# Altium PCB Part_3_ESP_CAM.PcbDoc
Units mm, origin at the board's own origin, x right, y up, seen from the top; angles counter-clockwise.
Board outline 30 x 59.5 mm, 2 copper layers (Top Layer, Bottom Layer); 2 components, 0 nets, 20 pads, 0 vias.
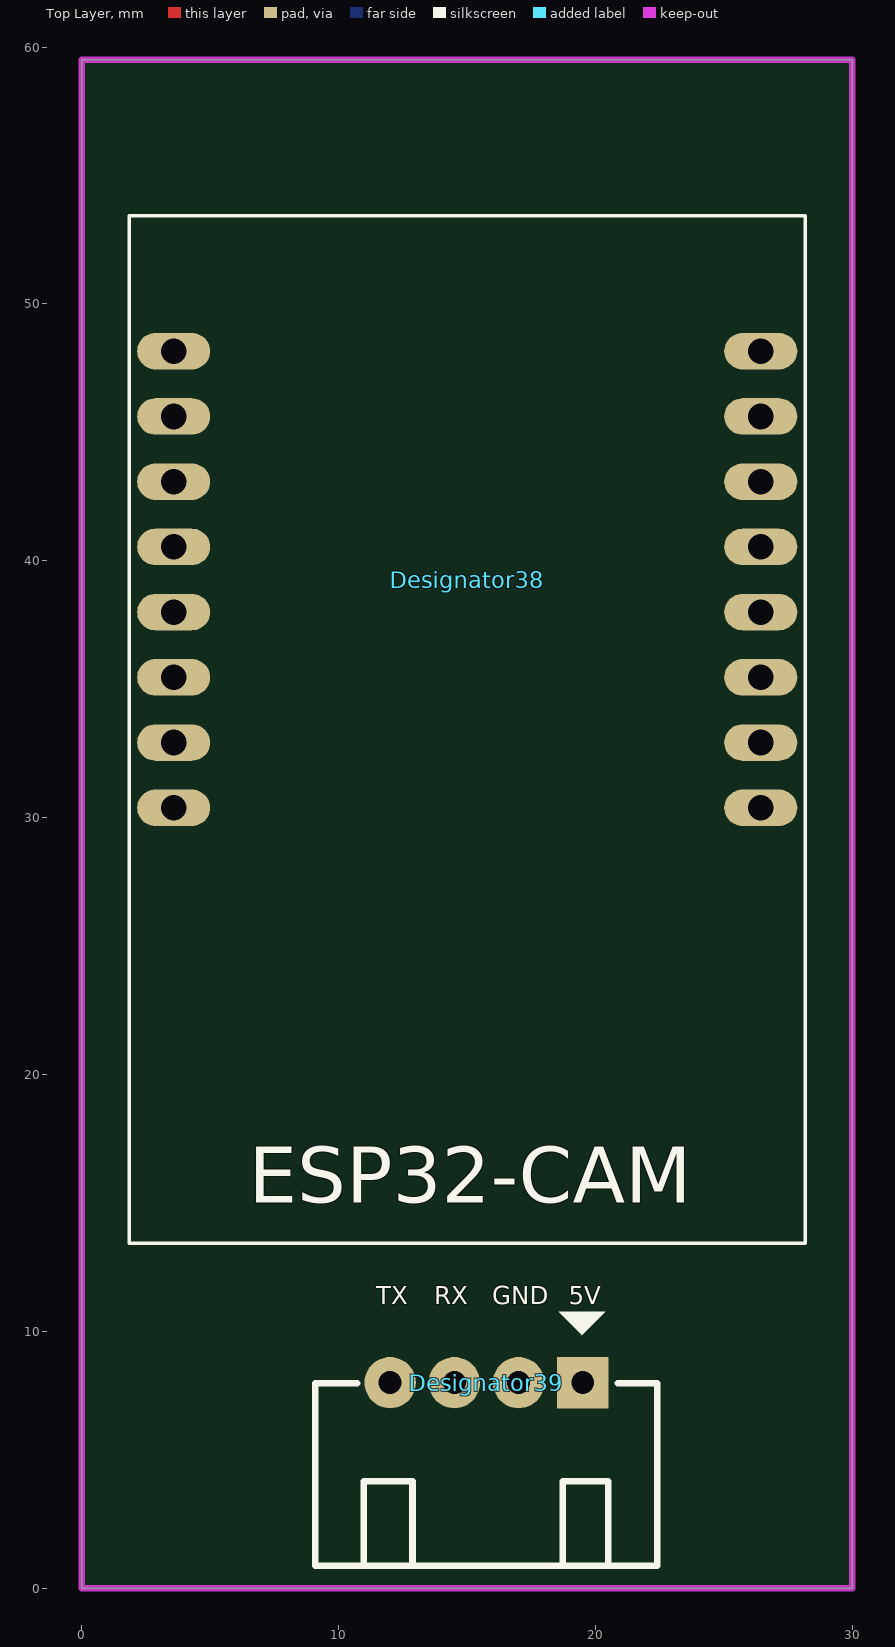
[diagram p0: Top Layer view]
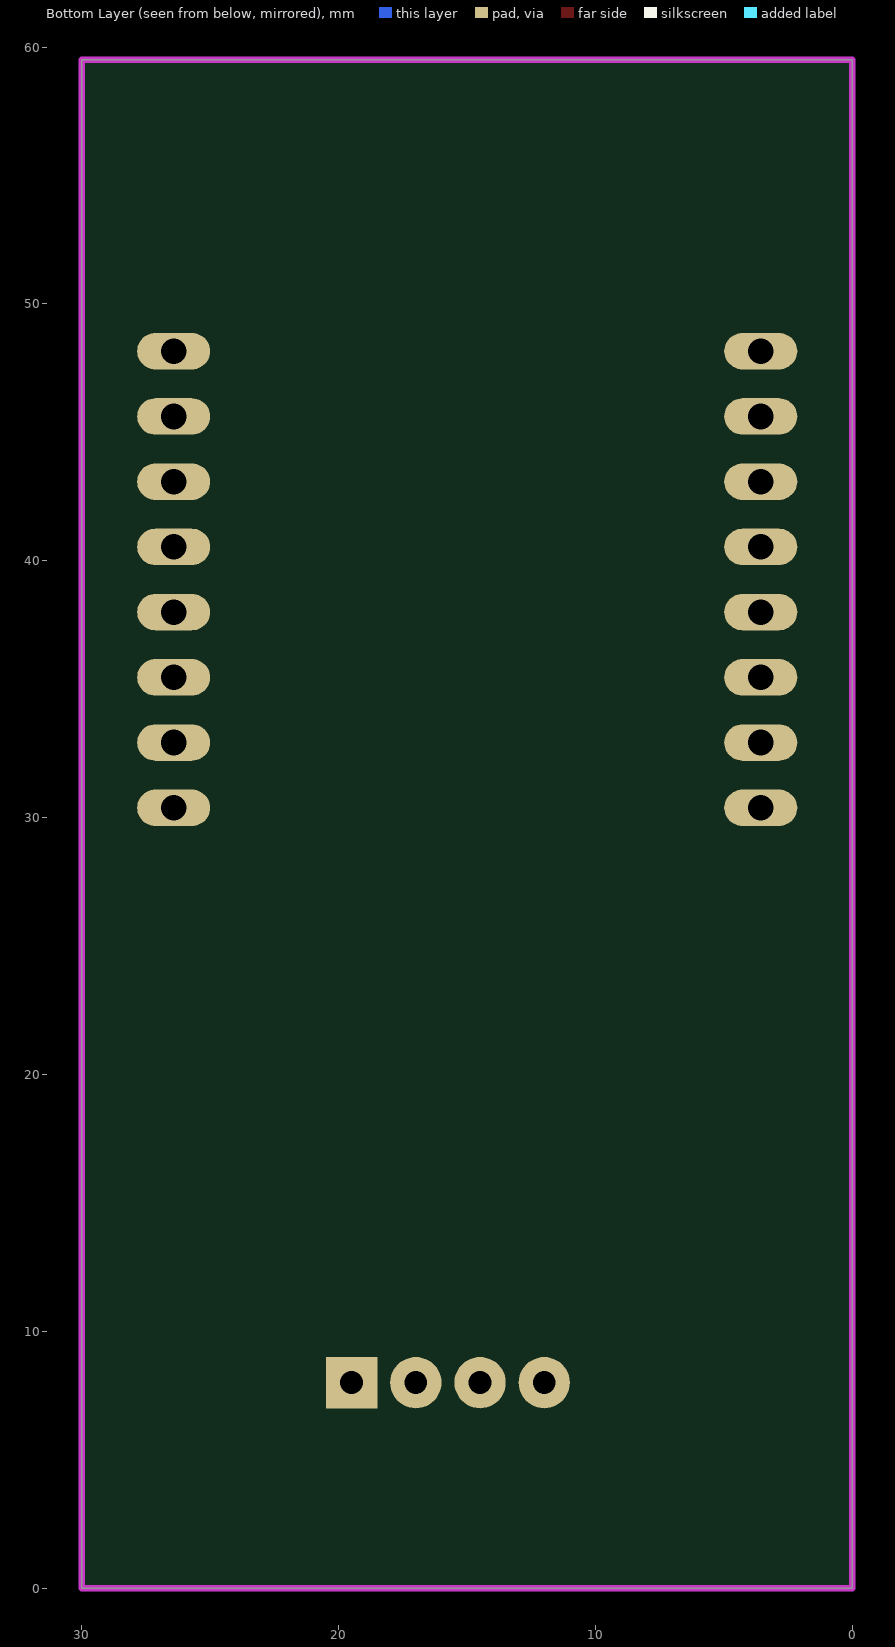
[diagram p1: Bottom Layer view, seen from below]

## Layer stack, top to bottom
Top Solder: solder mask 0.0102, Solder Resist, Dk 3.5
Top Layer: signal copper 0.0356
Dielectric 1: dielectric 0.32, FR-4, Dk 4.8
Bottom Layer: signal copper 0.0356
Bottom Solder: solder mask 0.0102, Solder Resist, Dk 3.5

## Board outline
0,0 0,59.5 30,59.5 30,0

## Design rules (kind name [scope] priority, off if disabled: settings)
Clearance [All] p1: gap=0.254 ignorepadtopadclearanceinfootprint=FALSE except(0: Arc-Hole Track-Hole SMDPad-Hole THPad-Hole Via-Hole Fill-Hole Poly-Hole Region-Hole Text-Hole)
PolygonConnect [All] p1: connectstyle=Relief reliefconductorwidth=0.254 reliefentries=4 polygonreliefangle="90 Angle" airgapwidth=0.254
RoutingVias [All] p1: holewidth=0.711 width=1.27 viastyle="Through Hole" minholewidth=0.711 minwidth=1.27 maxholewidth=0.711 maxwidth=1.27
SolderMaskExpansion [All] p1: expansion=0.102 istentingtop=FALSE
Width [All] p1: maxlimit=0.254 minlimit=0.254 preferedwidth=0.254
30 further rules are at their usual default settings.

## Components (designator, comment, footprint, x,y, rotation, side; value= is the part's Value field where it differs from the comment)
Designator38 "Comment" ESP32-CAM 15,38 r0 top
Designator39 "Comment" "Header 4P DC 2.54" 19.475,7.975 r270 top

## Footprints (in the part's own frame and the unit in brackets; to place one, negate y for a bottom-side part, rotate by r counter-clockwise, add the part's x,y. Pads: shape width x height; smd on the part's side, far side on the other; paste and mask are expansions set on the pad)
ESP32-CAM [mil]
  oval 112x56 hole 39.37: P$1(-450,400) P$2(-450,300) P$3(-450,200) P$4(-450,100) P$5(-450,0) P$6(-450,-100) P$7(-450,-200) P$8(-450,-300) P$9(450,-300) P$10(450,-200) P$11(450,-100) P$12(450,0) P$13(450,100) P$14(450,200) P$15(450,300) P$16(450,400)
  silkscreen extent -518,-967 518,607, body extent -531,-787 531,787, height 177
"Header 4P DC 2.54" [mil]
  rect 78.74x78.74 hole 35: 1(-1,1)
  round 78.74 hole 35: 2(-1,-97.42) 3(-1,-195.85) 4(-1,-294.28)
  silkscreen extent -110,-409 280,115, body extent 5,-413 278,123, height 290

## Nets (pads, with @x,y where several pads share a name; then routed paths per layer and width w, separated by ;. In a path a pad name is that pad's centre, name@x,y a point inside that pad or via, vN(x,y) a via of type N, cw(c..) or ccw(c..) an arc to the next point about the centre after c; other vN are vias at no path point)
pads on no net: Designator38.P$1 Designator38.P$2 Designator38.P$3 Designator38.P$4 Designator38.P$5 Designator38.P$6 Designator38.P$7 Designator38.P$8 Designator38.P$9 Designator38.P$10 Designator38.P$11 Designator38.P$12 Designator38.P$13 Designator38.P$14 Designator38.P$15 Designator38.P$16 Designator39.1 Designator39.2 Designator39.3 Designator39.4

## Keep-outs
Keep-Out Layer:
  the board outline again, w0.254

## Silkscreen, mask and mechanical layers (free items; w line width, h text height)
Top Overlay:
  text "TX" at 11.45,11.05 h0.7
  text "RX" at 13.717,11.05 h0.7
  text "GND" at 15.983,11.05 h0.7
  text "5V" at 18.95,11.05 h0.7

## Text inside footprints (layer, text, board x,y; h text height)
Designator38: Top Overlay "ESP32-CAM" at 6.5,15 h2.18